# Altium PCB PCB1.PcbDoc
Units mil, origin at the board's own origin, x right, y up, seen from the top; angles counter-clockwise.
Board outline 2945 x 2950 mil, 2 copper layers (Top Layer, Bottom Layer); 7 components, 22 nets, 67 pads, 8 vias.
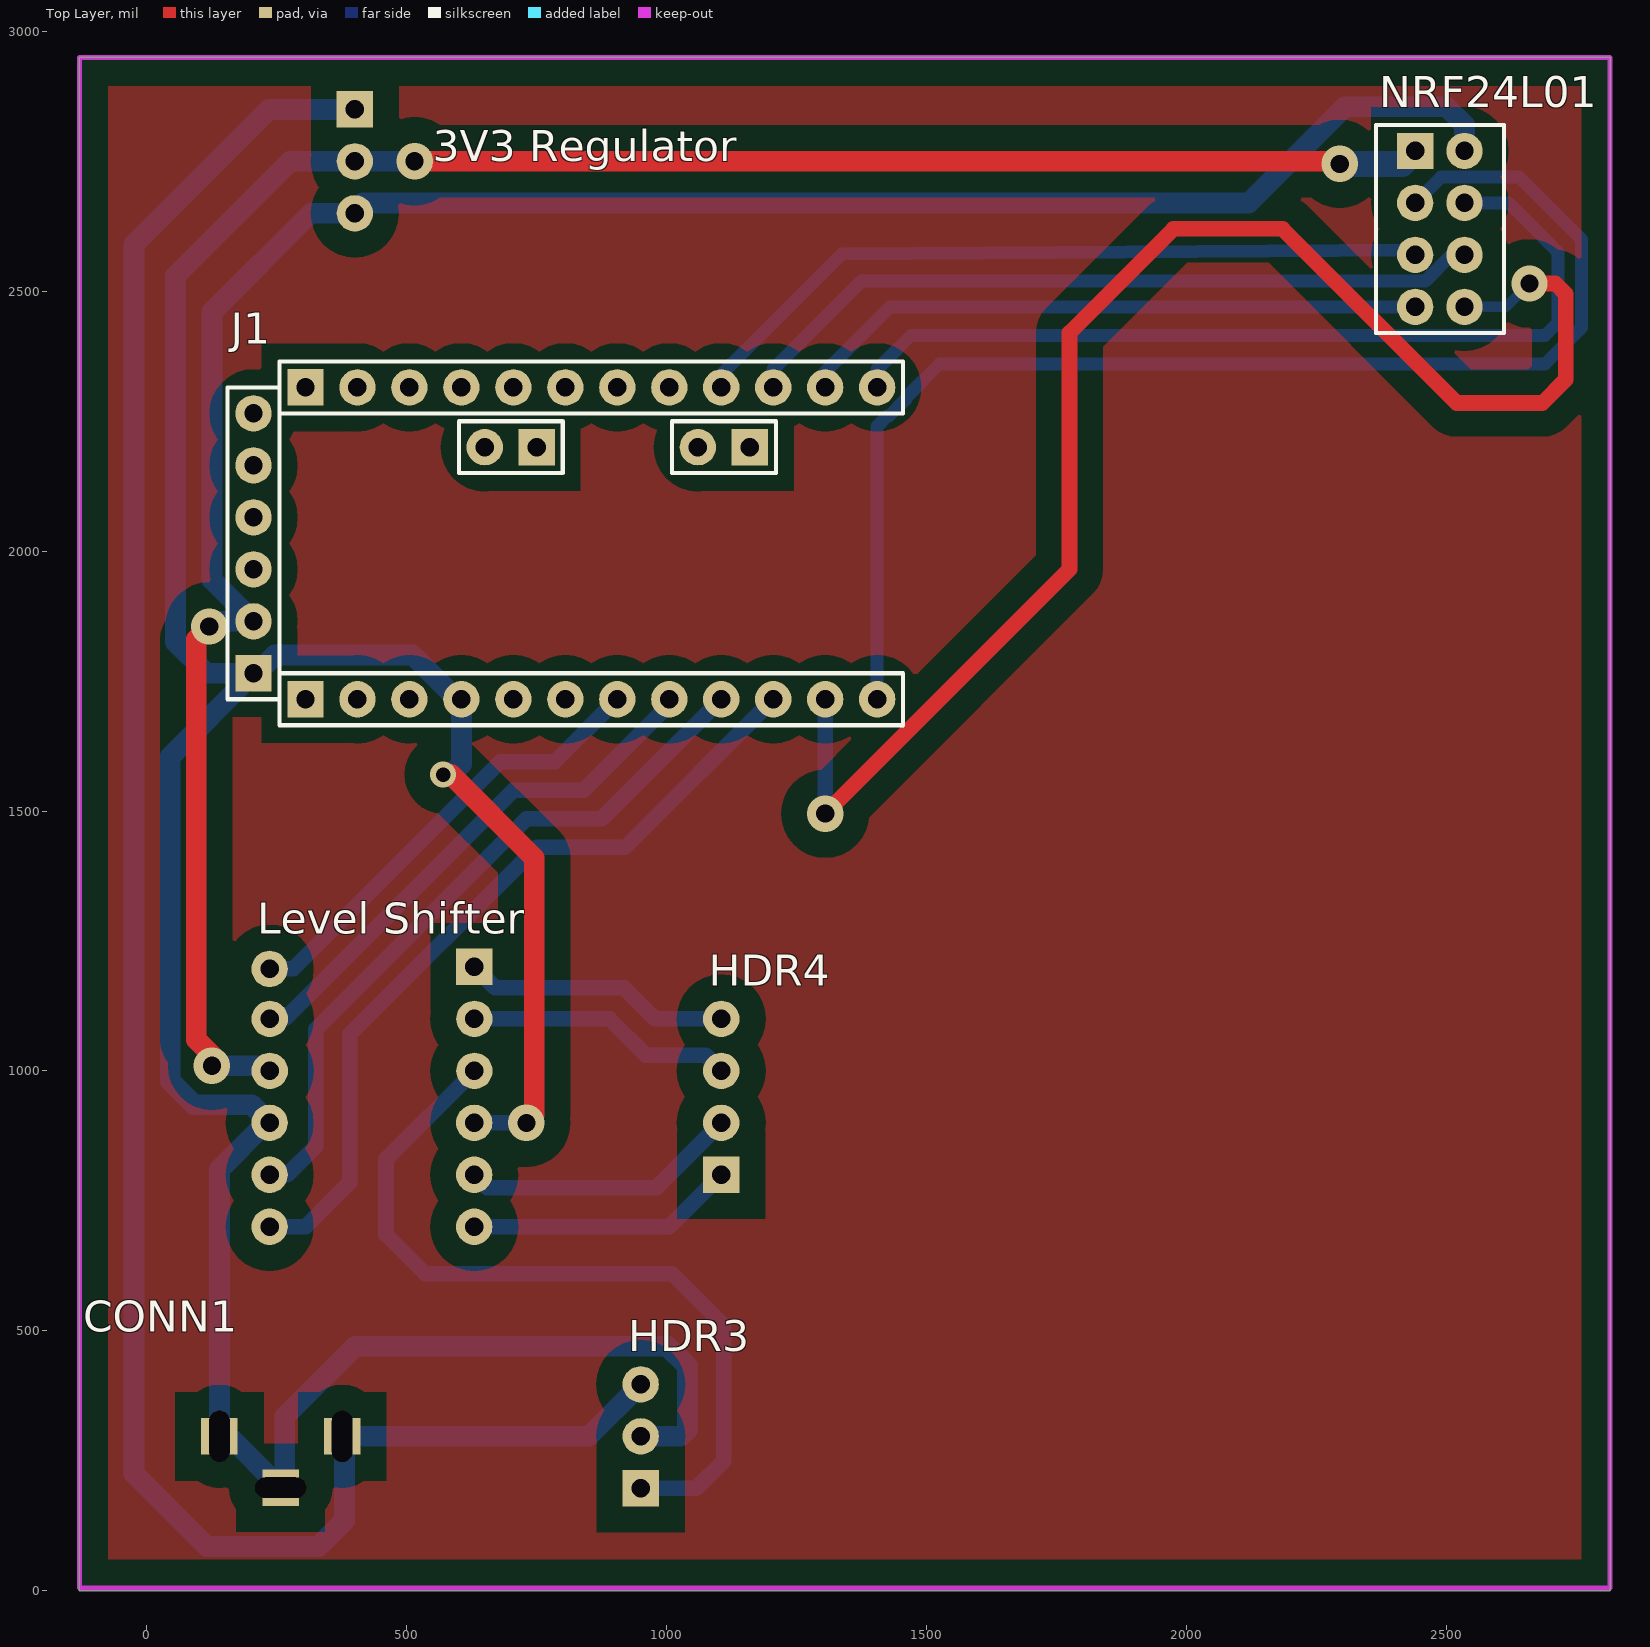
[diagram p0: Top Layer view]
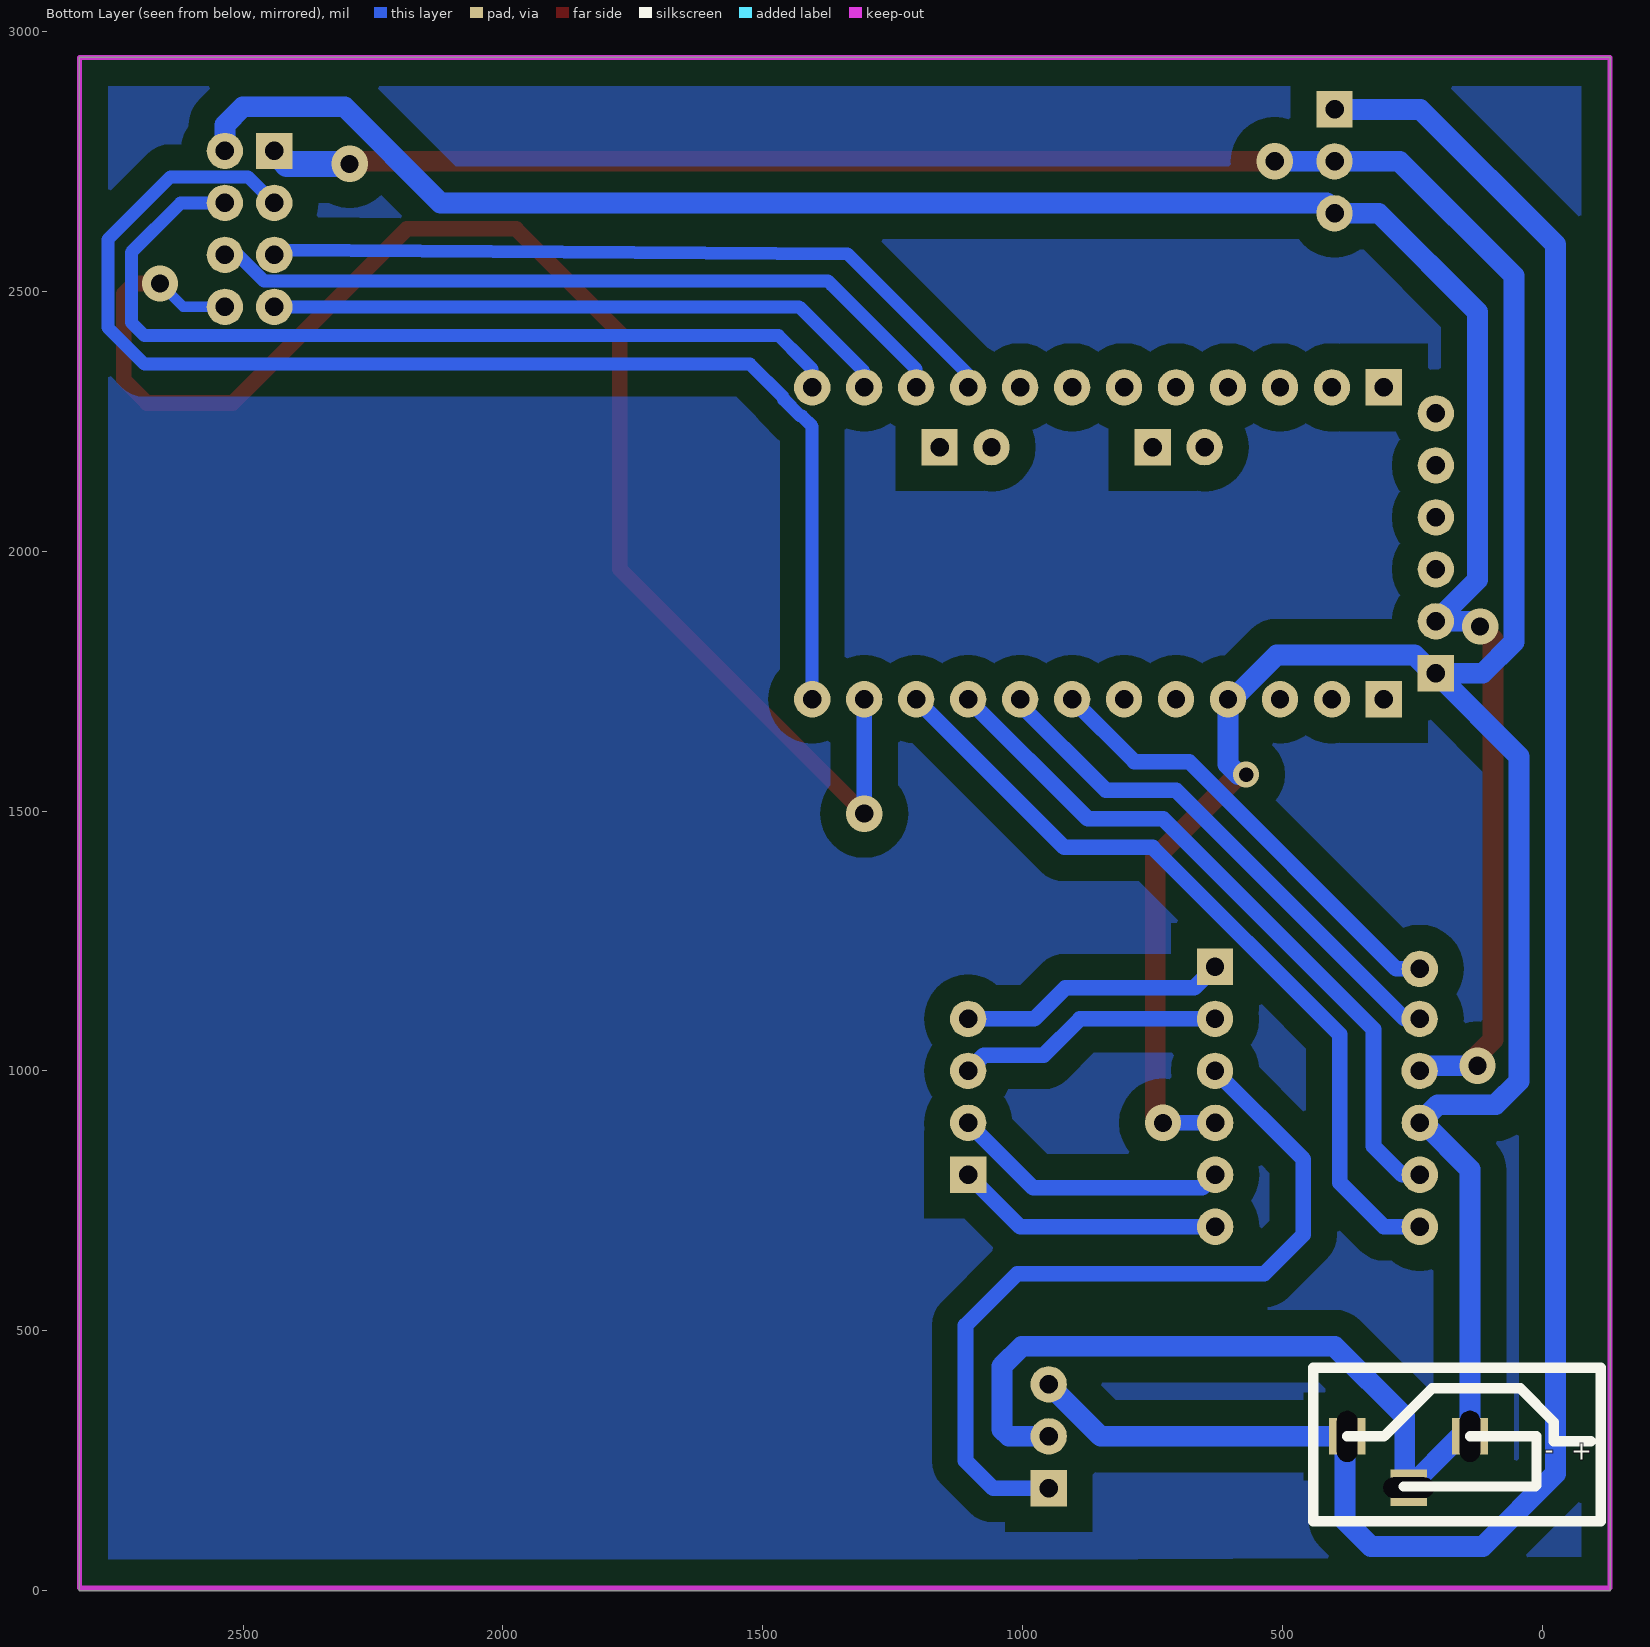
[diagram p1: Bottom Layer view, seen from below]

## Layer stack, top to bottom
Top Solder: solder mask 0.4, Solder Resist, Dk 3.5
Top Layer: signal copper 1.4
Dielectric 1: dielectric 12.6, FR-4, Dk 4.8
Bottom Layer: signal copper 1.4
Bottom Solder: solder mask 0.4, Solder Resist, Dk 3.5

## Board outline
-130,0 -130,2950 2815,2950 2815,0

## Design rules (kind name [scope] priority, off if disabled: settings)
Clearance "Copper Pour" [InPolygon] p1: gap=50 ignorepadtopadclearanceinfootprint=FALSE
Clearance [All] p2: gap=1 ignorepadtopadclearanceinfootprint=FALSE
PolygonConnect [All] p1: connectstyle=Relief reliefconductorwidth=10 reliefentries=4 polygonreliefangle="90 Angle" airgapwidth=10
RoutingVias [All] p1: holewidth=35 width=70 viastyle="Through Hole" minholewidth=1 minwidth=1 maxholewidth=35 maxwidth=70
SolderMaskExpansion [All] p1: expansion=4
Width [All] p1: maxlimit=50 minlimit=10 preferedwidth=10
30 further rules are at their usual default settings.

## Components (designator, comment, footprint, x,y, rotation, side; value= is the part's Value field where it differs from the comment)
"3V3 Regulator" "3-Pos" "Header3 - SIMPLE" 539.33,2921.2 r270 top
CONN1 "DC Jack" "DC Jack" 236.3,300 r90 top
HDR3 "3-Pos" "Header3 - SIMPLE" 810.67,125.66 r90 top
HDR4 "4-Pos" Header4-simple 965.67,728.87 r90 top
J1 "600023" "Arduino Pro Mini" 149.09,2315 r0 top
"Level Shifter" "12-Pos" "Module-level shifter" 631.18,1200 r270 top
NRF24L01 "ESP01, NRF2401 Modules" Header8 2535.39,2769.61 r270 top

## Footprints (in the part's own frame and the unit in brackets; to place one, negate y for a bottom-side part, rotate by r counter-clockwise, add the part's x,y. Pads: shape width x height; smd on the part's side, far side on the other; paste and mask are expansions set on the pad)
"Arduino Pro Mini" [mil] "CONN 24 Pos for Arduino Pro Mini"
  rect 70x70 hole 35.43: 1(55.91,-550) 7(155.91,-600) 30(155.91,0) 32(600.91,-115) 34(1010.91,-115)
  round 70 hole 35.43: 2(55.91,-450) 3(55.91,-350) 4(55.91,-250) 5(55.91,-150) 6(55.91,-50) 8(255.91,-600) 9(355.91,-600) 10(455.91,-600) 11(555.91,-600) 12(655.91,-600) 13(755.91,-600) 14(855.91,-600) 15(955.91,-600) 16(1055.91,-600) 17(1155.91,-600) 18(1255.91,-600) 19(1255.91,0) 20(1155.91,0) 21(1055.91,0) 22(955.91,0) 23(855.91,0) 24(755.91,0) 25(655.91,0) 26(555.91,0) 27(455.91,0) 28(355.91,0) 29(255.91,0) 31(500.91,-115) 33(910.91,-115)
  silkscreen extent 6,-650 1306,50
"DC Jack" [mm] "Conn, Female, DC Jack 6mm hole diameter"
  rect 1.778x1.778 hole 1 slot 2.5 at 90 deg: 1(-2.59,-0.53)
  rect 1.778x1.778 hole 1 slot 2.5 at 0 deg: 2(-0.08,2.46) 3(-0.08,-3.54)
  body extent -5.51,-5.23 4.26,9.39, height 10.67
"Header3 - SIMPLE" [mil] "Shrouded Female header 4-pos"
  rect 70x70 hole 35.43: 1(71.2,-139.33)
  round 70 hole 35.43: 2(171.2,-139.33) 3(271.2,-139.33)
Header4-simple [mil] "Shrouded Female header 4-pos"
  rect 70x70 hole 35.43: 1(71.2,-139.33)
  round 70 hole 35.43: 2(171.2,-139.33) 3(271.2,-139.33) 4(371.2,-139.33)
Header8 [mm] "Shrouded Female header 8-pos"
  rect 1.778x1.778 hole 0.9: 1(-0.01,-2.42)
  round 1.778 hole 0.9: 2(-0.01,-0.01) 3(2.53,-2.42) 4(2.53,-0.01) 5(5.07,-2.42) 6(5.07,-0.01) 7(7.61,-2.42) 8(7.61,-0.01)
  silkscreen extent -1.28,-4.33 8.88,1.92, body extent -1.28,-4.37 8.88,1.9, height 8
"Module-level shifter" [mil] "level-shifter"
  rect 70x70 hole 35.43: 1(0,-1.18)
  round 70 hole 35.43: 2(100,-1.18) 3(200,-1.18) 4(299.94,-1.54) 5(399.94,-1.54) 6(499.94,-1.54) 7(499.94,-395.24) 8(399.94,-395.24) 9(299.94,-395.24) 10(200,-394.88) 11(100,-394.88) 12(3.87,-395.24)

## Part data
"3V3 Regulator" HDR3: library part 600032, "HDR, Female 3-position"
CONN1: library part 600035, "CONN, 6mm Hole Size DC Jack"
HDR4: library part 600031, "HDR, Female 4-position"
J1: "CONN, 24-Pos, for Arduino Pro Mini"
"Level Shifter": library part 600048, "Module, level-shifter"
NRF24L01: library part 600030, "Module, Female HDR 8-Position"

## Via types
v1: diameter 70, hole 35, Top Layer to Bottom Layer, 7 vias
v2: diameter 50, hole 28, Top Layer to Bottom Layer, 1 vias

## Nets (pads, with @x,y where several pads share a name; then routed paths per layer and width w, separated by ;. In a path a pad name is that pad's centre, name@x,y a point inside that pad or via, vN(x,y) a via of type N, cw(c..) or ccw(c..) an arc to the next point about the centre after c; other vN are vias at no path point)
3V3: "3V3 Regulator.3" "Level Shifter.10" J1.2 NRF24L01.2 | length 4323.9
  Top Layer w40: v1(120,1855) 95,1830 95,1060 125,1030 v1(125,1010) ; J1.2@196.45,1865 J1.2
  Bottom Layer w40: v1(120,1855) 130,1865 J1.2 125,1945 125,2460 315,2650 400,2650 ; v1(125,1010) 226.3,1010 236.3,1000 ; 415,2670 2120,2670 2305,2855 2500,2855 2535,2820 NRF24L01.2
5V: "Level Shifter.3" HDR3.1 | length 1549.9
  Bottom Layer w30: 630,1000 460,830 460,685 535,610 1010,610 1110,510 1110,250 1056.85,196.85 HDR3.1
9V: "3V3 Regulator.1" CONN1.3 HDR3.3 | length 4161.7
  Top Layer w50: CONN1.3@375,296.18 CONN1.3
  Bottom Layer w40: 400,2850 235,2850 -25,2590 -25,225 115,85 330,85 380,135 380,292.52 CONN1.3 850,296.85 HDR3.3
GND: "3V3 Regulator.2" "Level Shifter.4" "Level Shifter.9" CONN1.1 CONN1.2 HDR3.2 J1.1 J1.10 NRF24L01.1 | length 7945.1
  Top Layer w10: v1@2290,2750 v1(2295,2745)
  Top Layer w40: v1(515,2750) v1@2290,2750 ; v2(570,1570) 585,1570 745,1410 745,915 v1(730,900)
  Top Layer w50: 400,2750 405,2745
  Bottom Layer w30: 629.64,900.06 v1@729.94,900.06
  Bottom Layer w40: v1(515,2750) 400,2750 275,2750 55,2530 55,1825 115,1765 J1.1 ; v2(570,1570) 585,1570 605,1590 J1.10 596.26,1715 511.26,1800 246.45,1800 211.45,1765 J1.1 ; HDR3.2@941.85,296.85 HDR3.2 1026.85,296.85 1040,310 1040,431.85 1001.85,470 400,470 265,335 265,205.87 CONN1.1 158.35,296.85 CONN1.2 139.45,810.55 228.96,900.06 235.94,900.06 201.01,935 90,935 45,980 45,1605 J1.1
  Bottom Layer w50: v1@729.94,900.06 v1(730,900) ; v1(2295,2745) 2415.12,2745 NRF24L01.1
IN1: "Level Shifter.1" HDR4.4 | length 516.4
  Bottom Layer w30: 630,1200 670,1160 917.97,1160 977.91,1100.06 HDR4.4
IN1_LV: "Level Shifter.12" J1.13 | length 884
  Bottom Layer w30: 235.94,1196.13 281.13,1196.13 680,1595 785,1595 J1.13
IN2: "Level Shifter.2" HDR4.3 | length 516.4
  Bottom Layer w30: 630,1100 890,1100 960,1030 1075.06,1030 HDR4.3
IN2_LV: "Level Shifter.11" J1.14 | length 1029.3
  Bottom Layer w30: 236.3,1100 265,1100 705,1540 840,1540 1005,1705 J1.14
IN3: "Level Shifter.5" HDR4.2 | length 537.5
  Bottom Layer w30: 629.64,800.06 654.71,775 979.94,775 HDR4.2
IN3_LV: "Level Shifter.8" J1.15 | length 1379.8
  Bottom Layer w30: 235.94,800.06 270.06,800.06 325,855 325,1080 730,1485 875,1485 J1.15
IN4: "Level Shifter.6" HDR4.1 | length 516.8
  Bottom Layer w30: 629.64,700.06 1005,700.06 HDR4.1
IN4_LV: "Level Shifter.7" J1.16 | length 1556.4
  Bottom Layer w30: 235.94,700.06 305.06,700.06 390,785 390,1070 750,1430 920,1430 J1.16
NRF_CE: J1.18 NRF24L01.3 | length 2520.6
  Bottom Layer w25: J1.18 1405,2240 1425,2260 1427.78,2260 1460,2292.22 1460,2295 1525,2360 1530,2360 2690,2360 2760,2430 2760,2600 2640,2720 2490.12,2720 NRF24L01.3
NRF_CSN: J1.19 NRF24L01.4 | length 1733.1
  Bottom Layer w25: J1.19 1405,2350 1442.5,2387.5 ; 1445,2390 1470,2415 2690,2415 2715,2440 2715,2575 2620,2670 NRF24L01.4
NRF_IRQ: J1.17 NRF24L01.8 | length 2921.8
  Top Layer w30: v1(1305,1495) 1775,1965 1775,2420 1975,2620 2185,2620 2520,2285 2685,2285 2730,2330 2730,2495 2710,2515 v1(2660,2515)
  Bottom Layer w20: NRF24L01.8 2615,2470 2631.72,2486.72 v1(2660,2515)
  Bottom Layer w30: v1(1305,1495) J1.17
NRF_MISO: J1.20 NRF24L01.7 | length 1216.9
  Bottom Layer w25: J1.20 1305,2345 1430,2470 NRF24L01.7
NRF_MOSI: J1.21 NRF24L01.6 | length 1466.7
  Bottom Layer w25: J1.21 1205,2350 1367.5,2512.5 ; 1360,2505 1375,2520 2460.16,2520 2510.16,2570 NRF24L01.6
NRF_SCK: J1.22 NRF24L01.5 | length 1460.3
  Bottom Layer w25: J1.22 1105,2340 1337.15,2572.15 2430.29,2579.69 NRF24L01.5
OUT1: 
OUT2: 
OUT3: 
OUT4: 
pads on no net: J1.3 J1.4 J1.5 J1.6 J1.7 J1.8 J1.9 J1.11 J1.12 J1.23 J1.24 J1.25 J1.26 J1.27 J1.28 J1.29 J1.30 J1.31 J1.32 J1.33 J1.34

## Polygon pours and split planes (outlines as drawn)
no net on Top Layer "no net" (solid, pour order 20): -105,25 -105,2915 2795,2915 2795,25
no net on Top Layer "ground pour" (solid, remove dead copper, pour order 4): 3890,94.55
no net on Bottom Layer "no net" (solid, pour order 24): -80,65 -80,2890 -85,2895 2770,2895 2770,55 2765,50
no net on Bottom Layer "no net" (solid, remove dead copper, pour order 18): 2140,1275
no net on Bottom Layer "no net" (solid, remove dead copper, pour order 16): 2040,1290
no net on Bottom Layer "ground pour" (solid, remove dead copper, pour order 6): 3895,85

## Keep-outs
Keep-Out Layer:
  lines w10: -130,5 2815,5 2815,2950 -130,2950 -130,5

## Text inside footprints (layer, text, board x,y; h text height)
CONN1: Bottom Overlay "-" at -4.25,241.73 h60; Bottom Overlay "+" at -55.43,239.76 h60